# Altium PCB Flex_design.PcbDoc
Units mm, origin at the board's own origin, x right, y up, seen from the top; angles counter-clockwise.
Board outline 64.63 x 25.28 mm, 4 copper layers (Top Layer, Top GND, Bottom GND, Bottom Layer), stack 0.76 mm thick; 2 components, 68 nets, 138 pads, 171 vias.
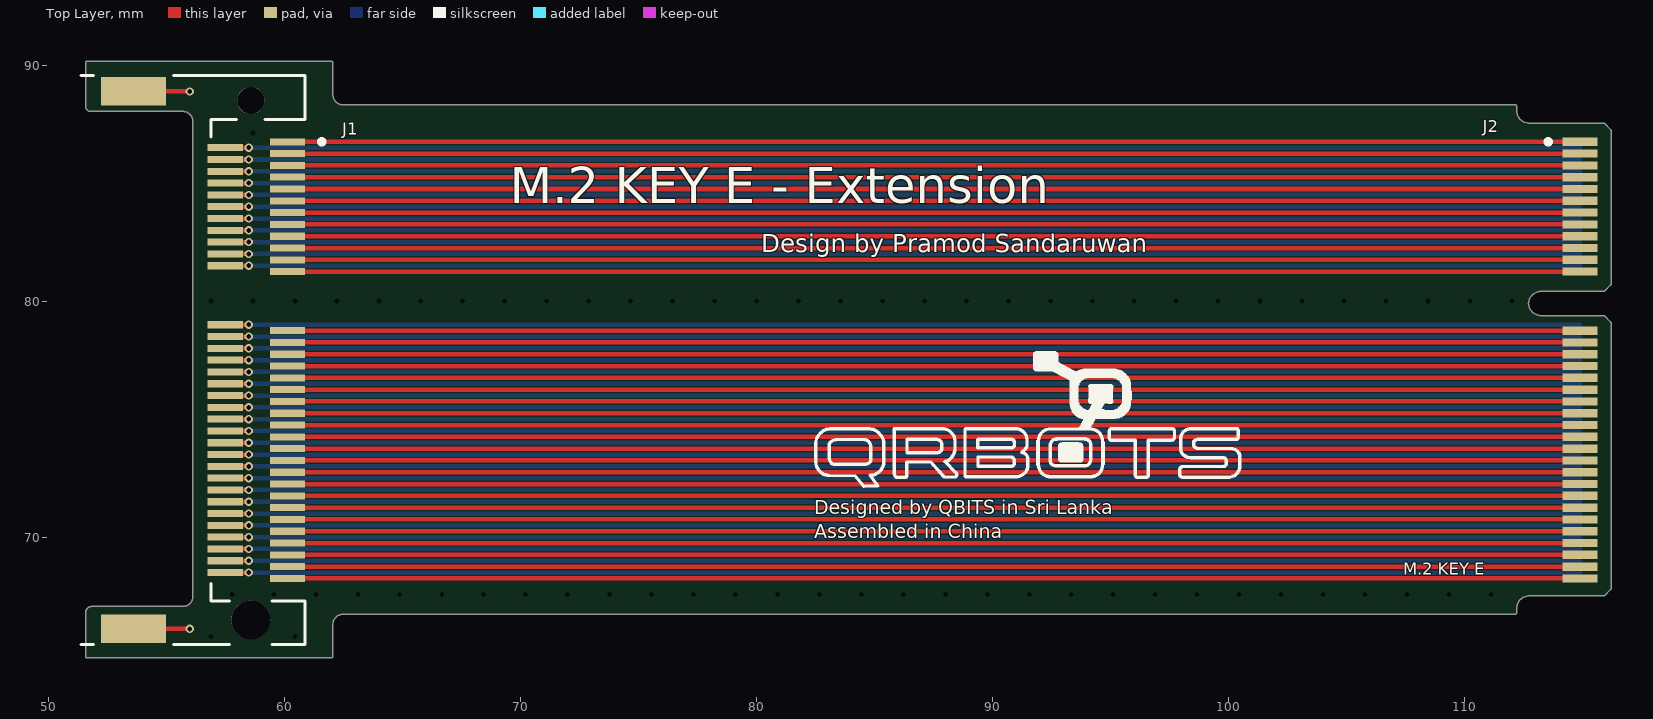
[diagram p0: Top Layer view]
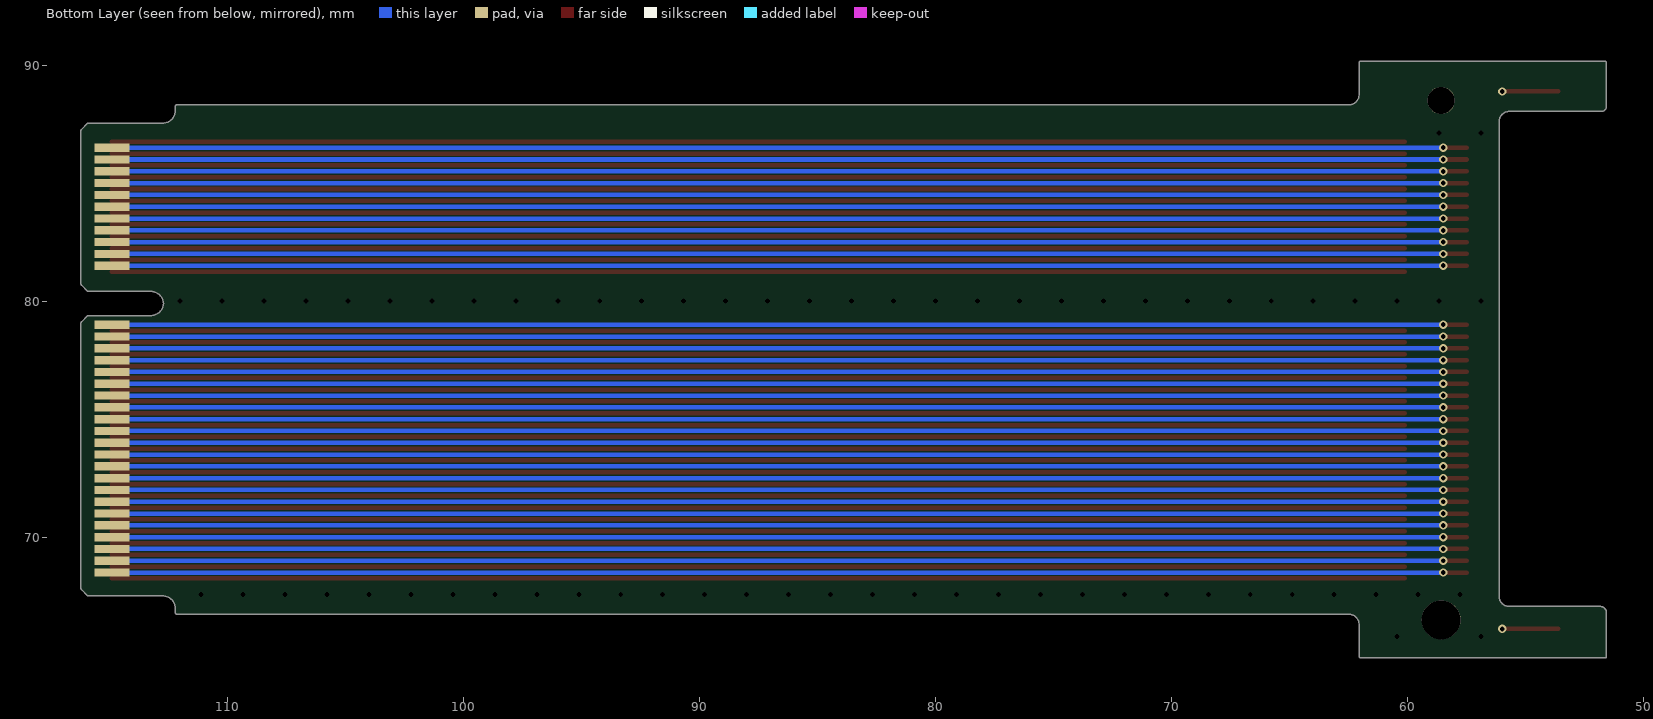
[diagram p1: Bottom Layer view, seen from below]
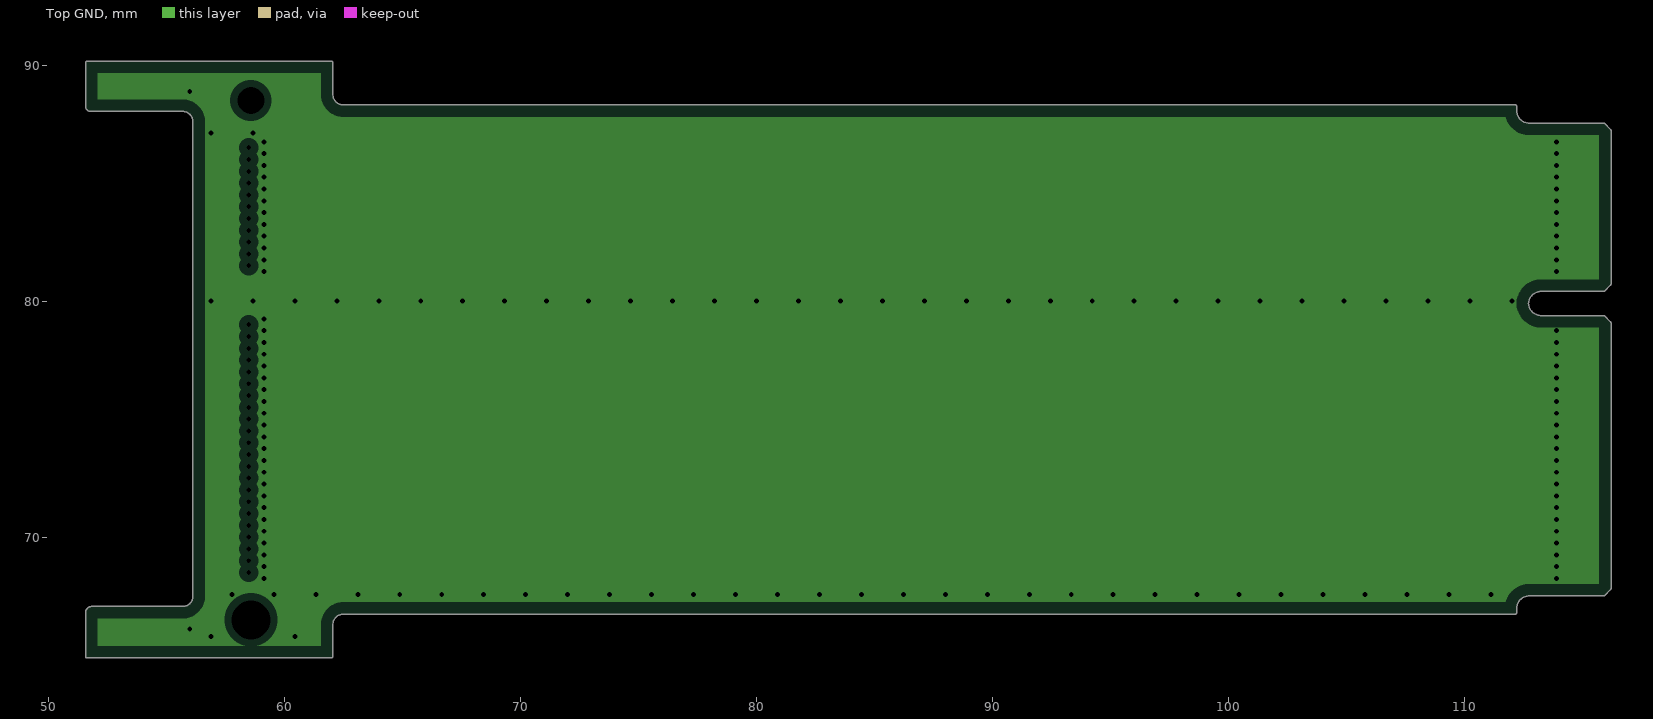
[diagram p2: Top GND, clearances drawn from the general rule]
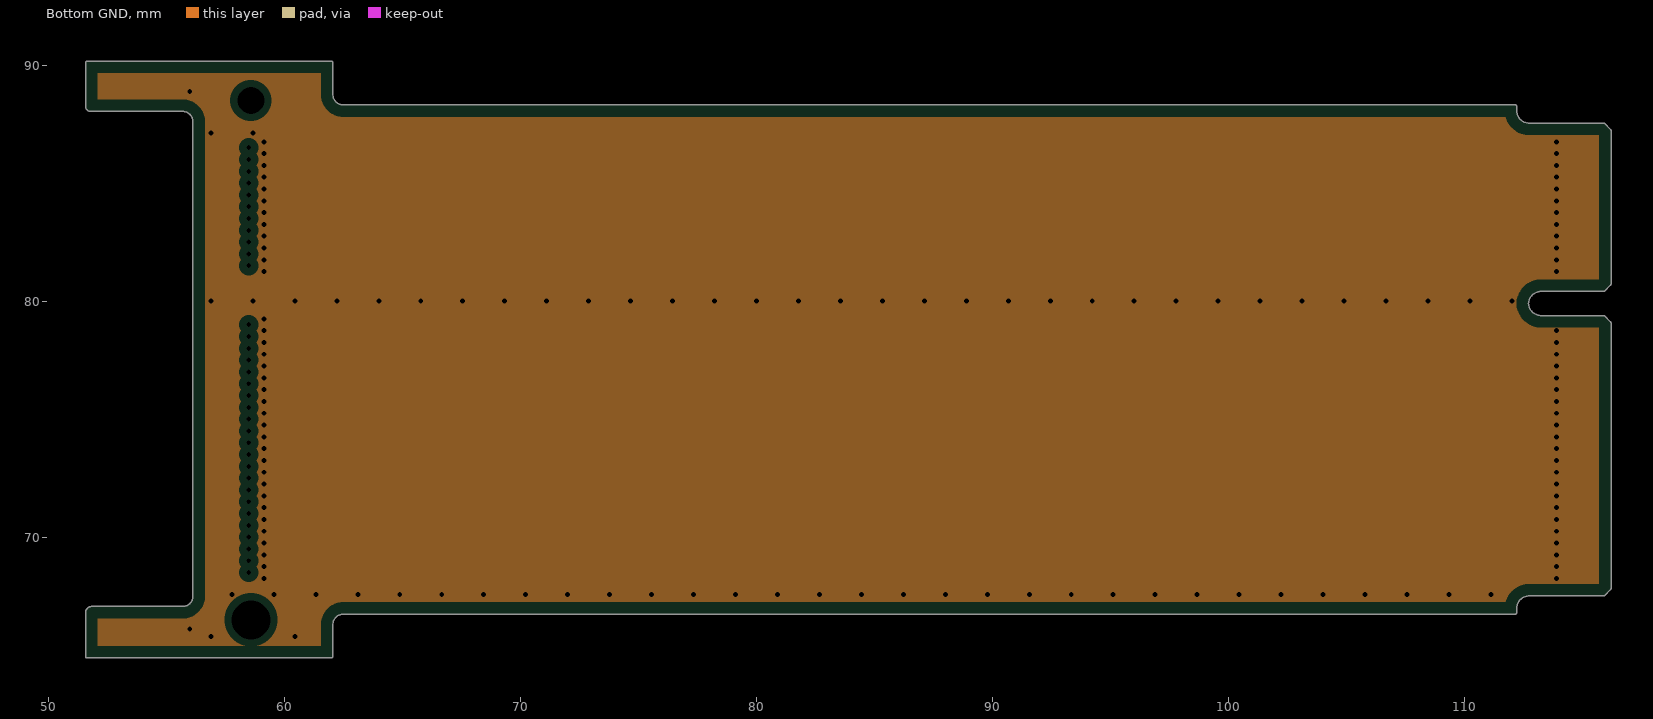
[diagram p3: Bottom GND, clearances drawn from the general rule]

## Layer stack, top to bottom
Top Solder: solder mask 0.0102, Solder Resist, Dk 3.5
Top Layer: signal copper 0.035
Dielectric 4: prepreg 0.11, PP-006, Dk 4.1
Top GND: plane copper 0.035, net GND
Dielectric 1: dielectric 0.4, FR-4, Dk 4.8
Bottom GND: plane copper 0.035, net GND
Dielectric 5: prepreg 0.11, PP-006, Dk 4.1
Bottom Layer: signal copper 0.035
Bottom Solder: solder mask 0.0102, Solder Resist, Dk 3.5

## Board outline
51.586,64.95 51.586,66.8 cw(c51.85,66.8) 51.85,67.064 55.7,67.064 ccw(c55.7,67.5) 56.136,67.5 56.136,87.6 ccw(c55.7,87.6) 55.7,88.036 51.8,88.036 cw(c51.8,88.25) 51.586,88.25 51.586,90.1 cw(c51.65,90.1) 51.65,90.164 62,90.164 cw(c62,90.1) 62.064,90.1 62.064,88.75 ccw(c62.5,88.75) 62.5,88.314 cw(c62.5,88.25) 62.501,88.314 104.2,88.314 112.15,88.314 cw(c112.15,88.25) 112.214,88.25 112.214,88.075 ccw(c112.75,88.075) 112.75,87.539 115.9,87.539 cw(c115.9,87.475) 115.945,87.52 116.195,87.27 cw(c116.15,87.225) 116.214,87.225 116.214,80.725 cw(c116.15,80.725) 116.195,80.68 115.945,80.43 cw(c115.9,80.475) 115.9,80.411 113.25,80.411 ccw(c113.25,80.475) 113.251,80.411 113.25,80.411 ccw(c113.25,79.875) 112.714,79.9 ccw(c113.25,79.925) 113.25,79.389 115.9,79.389 cw(c115.9,79.325) 115.945,79.37 116.195,79.12 cw(c116.15,79.075) 116.214,79.075 116.214,67.825 cw(c116.15,67.825) 116.195,67.78 115.945,67.53 cw(c115.9,67.575) 115.9,67.511 112.75,67.511 ccw(c112.75,66.975) 112.214,66.975 112.214,66.8 cw(c112.15,66.8) 112.15,66.736 111.4,66.736 62.501,66.736 62.5,66.736 ccw(c62.5,66.777) 62.501,66.736 62.5,66.736 ccw(c62.5,66.3) 62.064,66.3 62.064,64.95 cw(c62,64.95) 62,64.886 51.65,64.886 cw(c51.65,64.95)
board region "Layer Stack Region 1": 107,66.736 66,66.736 66,88.314 104.2,88.314 107,88.314
board region "Layer Stack Region 1": 66,66.736 62.5,66.736 62.415,66.728 62.258,66.663 62.137,66.542 62.072,66.385 62.064,66.3 62.064,64.95 62.064,64.937 62.054,64.914 62.036,64.896 62.013,64.886 62,64.886 51.65,64.886 51.637,64.886 51.614,64.896 51.596,64.914 51.586,64.937 51.586,64.95 51.586,66.8 51.586,66.852 51.626,66.949 51.701,67.024 51.798,67.064 51.85,67.064 55.7,67.064 55.785,67.072 55.942,67.137 56.063,67.258 56.128,67.415 56.136,67.5 56.136,87.6 56.128,87.685 56.063,87.842 55.942,87.963 55.785,88.028 55.7,88.036 51.8,88.036 51.757,88.036 51.679,88.069 51.619,88.129 51.586,88.207 51.586,88.25 51.586,90.1 51.586,90.113 51.596,90.136 51.614,90.154 51.637,90.164 51.65,90.164 62,90.164 62.013,90.164 62.036,90.154 62.054,90.136 62.064,90.113 62.064,90.1 62.064,88.75 62.072,88.665 62.137,88.508 62.258,88.387 62.415,88.322 62.501,88.314 66,88.314
board region "Layer Stack Region 1": 107,88.314 112.15,88.314 112.163,88.314 112.186,88.304 112.204,88.286 112.214,88.263 112.214,88.25 112.214,88.075 112.224,87.97 112.304,87.777 112.452,87.629 112.645,87.549 112.75,87.539 115.906,87.539 115.93,87.532 115.945,87.52 116.2,87.266 116.211,87.244 116.214,87.225 116.214,80.719 116.207,80.695 116.195,80.68 115.941,80.425 115.919,80.414 115.9,80.411 113.25,80.411 113.148,80.401 112.96,80.326 112.813,80.186 112.729,80.001 112.714,79.9 112.729,79.799 112.813,79.614 112.96,79.474 113.148,79.399 113.25,79.389 115.906,79.389 115.93,79.382 115.945,79.37 116.2,79.116 116.211,79.094 116.214,79.075 116.214,67.819 116.207,67.795 116.195,67.78 115.941,67.525 115.919,67.514 115.9,67.511 112.75,67.511 112.645,67.501 112.452,67.421 112.304,67.273 112.224,67.08 112.214,66.975 112.214,66.8 112.214,66.787 112.204,66.764 112.186,66.746 112.163,66.736 112.15,66.736 111.4,66.736 107,66.736

## Design rules (kind name [scope] priority, off if disabled: settings)
BackDrilling [InNet('GND')] p1: maxstublength=0.145 usetopbackdrill=TRUE usebottombackdrill=TRUE holeoversize=0.026 holetolplus=0 holetolminus=0
Clearance [All] p1: gap=0.127 ignorepadtopadclearanceinfootprint=TRUE except(0: Arc-Hole Track-Hole SMDPad-Hole THPad-Hole Via-Hole Fill-Hole Poly-Hole Region-Hole Text-Hole)
MinimumSolderMaskSliver [All] p1: minsoldermaskwidth=0.05
PlaneClearance [All] p1: clearance=0.3
PlaneConnect [All] p1: planeconnectstyle=Direct reliefexpansion=0.508 reliefentries=4 reliefconductorwidth=0.254 reliefairgap=0.254
PolygonConnect [All] p1: connectstyle=Relief reliefconductorwidth=0.254 reliefentries=4 polygonreliefangle="90 Angle" airgapwidth=0.254
RoutingVias [All] p1: holewidth=0.711 width=1.27 viastyle="Through Hole" minholewidth=0.711 minwidth=1.27 maxholewidth=0.711 maxwidth=1.27
SilkToSilkClearance [All] p1: silktosilkclearance=0.1
SilkToSolderMaskClearance [IsPad] p1: minsilkscreentomaskgap=0.1 clearancetoexposedcopper=TRUE
SolderMaskExpansion SolderMaskExpansion_via [IsVia] p1: expansion=0.102 istentingtop=TRUE
SolderMaskExpansion [All] p2: expansion=0.04 istentingtop=FALSE
Width [All] p1: maxlimit=0.191 minlimit=0.191 preferedwidth=0.191 substack1={DC98C919-03CF-4225-8EA8-CE3CF64AE8FB} impedanceprofiledriven=TRUE impedanceprofileid={71EC6365-5B8F-47C4-84C8-B24A6046902B} impedanceprofilevalue=50.000000 minimp=50.000000 maximp=50.000000 favimp=50.000000
25 further rules are at their usual default settings.

## Components (designator, comment, footprint, x,y, rotation, side; value= is the part's Value field where it differs from the comment)
J1 "MDT180E01001" AMPHENOL_MDT180E01001 58.59,77.5 r270 top locked
J2 "M.2_KEY_E" M.2_KEY_E 116.15,80.725 r90 top

## Footprints (in the part's own frame and the unit in brackets; to place one, negate y for a bottom-side part, rotate by r counter-clockwise, add the part's x,y. Pads: shape width x height; smd on the part's side, far side on the other; paste and mask are expansions set on the pad)
AMPHENOL_MDT180E01001 [mm]
  rect 0.3x1.5 smd: 1(-9.25,1.55) 2(-9,-1.09) 3(-8.75,1.55) 4(-8.5,-1.09) 5(-8.25,1.55) 6(-8,-1.09) 7(-7.75,1.55) 8(-7.5,-1.09) 9(-7.25,1.55) 10(-7,-1.09) 11(-6.75,1.55) 12(-6.5,-1.09) 13(-6.25,1.55) 14(-6,-1.09) 15(-5.75,1.55) 16(-5.5,-1.09) 17(-5.25,1.55) 18(-5,-1.09) 19(-4.75,1.55) 20(-4.5,-1.09) 21(-4.25,1.55) 22(-4,-1.09) 23(-3.75,1.55) 32(-1.5,-1.09) 33(-1.25,1.55) 34(-1,-1.09) 35(-0.75,1.55) 36(-0.5,-1.09) 37(-0.25,1.55) 38(0,-1.09) 39(0.25,1.55) 40(0.5,-1.09) 41(0.75,1.55) 42(1,-1.09) 43(1.25,1.55) 44(1.5,-1.09) 45(1.75,1.55) 46(2,-1.09) 47(2.25,1.55) 48(2.5,-1.09) 49(2.75,1.55) 50(3,-1.09) 51(3.25,1.55) 52(3.5,-1.09) 53(3.75,1.55) 54(4,-1.09) 55(4.25,1.55) 56(4.5,-1.09) 57(4.75,1.55) 58(5,-1.09) 59(5.25,1.55) 60(5.5,-1.09) 61(5.75,1.55) 62(6,-1.09) 63(6.25,1.55) 64(6.5,-1.09) 65(6.75,1.55) 66(7,-1.09) 67(7.25,1.55) 68(7.5,-1.09) 69(7.75,1.55) 70(8,-1.09) 71(8.25,1.55) 72(8.5,-1.09) 73(8.75,1.55) 74(9,-1.09) 75(9.25,1.55)
  rect 1.2x2.75 smd: S1(-11.385,-4.97) S2(11.385,-4.97)
  round 1.15 hole 1.15 unplated: ""(-11,0)
  round 1.65 hole 1.65 unplated: ""(11,0)
  silkscreen extent -12.05,-7.2 12.05,3.1, body extent -11.95,-7 11.95,2.2, height 1.75
M.2_KEY_E [mm]
  rect 0.35x1.5 smd: 1(6.025,1.25) 3(5.525,1.25) 5(5.025,1.25) 7(4.525,1.25) 9(4.025,1.25) 11(3.525,1.25) 13(3.025,1.25) 15(2.525,1.25) 17(2.025,1.25) 19(1.525,1.25) 21(1.025,1.25) 23(0.525,1.25) 33(-1.975,1.25) 35(-2.475,1.25) 37(-2.975,1.25) 39(-3.475,1.25) 41(-3.975,1.25) 43(-4.475,1.25) 45(-4.975,1.25) 47(-5.475,1.25) 49(-5.975,1.25) 51(-6.475,1.25) 53(-6.975,1.25) 55(-7.475,1.25) 57(-7.975,1.25) 59(-8.475,1.25) 61(-8.975,1.25) 63(-9.475,1.25) 65(-9.975,1.25) 67(-10.475,1.25) 69(-10.975,1.25) 71(-11.475,1.25) 73(-11.975,1.25) 75(-12.475,1.25)
  rect 0.35x1.5 smd far side: 2(5.775,1.25) 4(5.275,1.25) 6(4.775,1.25) 8(4.275,1.25) 10(3.775,1.25) 12(3.275,1.25) 14(2.775,1.25) 16(2.275,1.25) 18(1.775,1.25) 20(1.275,1.25) 22(0.775,1.25) 32(-1.725,1.25) 34(-2.225,1.25) 36(-2.725,1.25) 38(-3.225,1.25) 40(-3.725,1.25) 42(-4.225,1.25) 44(-4.725,1.25) 46(-5.225,1.25) 48(-5.725,1.25) 50(-6.225,1.25) 52(-6.725,1.25) 54(-7.225,1.25) 56(-7.725,1.25) 58(-8.225,1.25) 60(-8.725,1.25) 62(-9.225,1.25) 64(-9.725,1.25) 66(-10.225,1.25) 68(-10.725,1.25) 70(-11.225,1.25) 72(-11.725,1.25) 74(-12.225,1.25)
  silkscreen extent 5.93,2.5 6.12,2.7

## Part data
J1: "PCIe M.2 Connectors, Storage and Server Connector, P=0.5mm, H=1.8mm, Key E, 30Î¼in Au Plating", Package=None, Availability="In Stock", Check_prices=https://www.snapeda.com/parts/MDT180E01001/Amphenol/view-part/?ref=eda, MF=Amphenol, MP=MDT180E01001, Price=None, Purchase-URL=https://pricing.snapeda.com/search/part/MDT180E01001/?ref=eda, SnapEDA_Link=https://www.snapeda.com/parts/MDT180E01001/Amphenol/view-part/?ref=snap

## Via types
v1: diameter 0, hole 0.21, Top GND to Bottom GND, tented both sides, 69 vias
v2: diameter 0, hole 0.21, Top Layer to Bottom Layer, 67 vias
v3: diameter 0.35, hole 0.21, Top Layer to Bottom Layer, tented both sides, 35 vias

## Nets (pads, with @x,y where several pads share a name; then routed paths per layer and width w, separated by ;. In a path a pad name is that pad's centre, name@x,y a point inside that pad or via, vN(x,y) a via of type N, cw(c..) or ccw(c..) an arc to the next point about the centre after c; other vN are vias at no path point)
GND: J1.S1 J1.S2 | length 4.8
  Top Layer w0.191: J1.S2 v3(56,66.115) ; J1.S1 v3(56,88.885)
  other v1: 59.14,68.25 113.9,68.25 59.14,68.75 113.9,68.75 59.14,69.25 113.9,69.25 59.14,69.75 113.9,69.75 59.14,70.25 113.9,70.25 59.14,70.75 113.9,70.75 59.14,71.25 113.9,71.25 59.14,71.75 113.9,71.75 59.14,72.25 113.9,72.25 59.14,72.75 113.9,72.75 59.14,73.25 113.9,73.25 59.14,73.75 113.9,73.75 59.14,74.25 113.9,74.25 59.14,74.75 113.9,74.75 59.14,75.25 113.9,75.25 59.14,75.75 113.9,75.75 59.14,76.25 113.9,76.25 59.14,76.75 113.9,76.75 59.14,77.25 113.9,77.25 59.14,77.75 113.9,77.75 59.14,78.25 113.9,78.25 59.14,78.75 113.9,78.75 59.14,79.25 59.14,81.25 113.9,81.25 59.14,81.75 113.9,81.75 59.14,82.25 113.9,82.25 59.14,82.75 113.9,82.75 59.14,83.25 113.9,83.25 59.14,83.75 113.9,83.75 59.14,84.25 113.9,84.25 59.14,84.75 113.9,84.75 59.14,85.25 113.9,85.25 59.14,85.75 113.9,85.75 59.14,86.25 113.9,86.25 59.14,86.75 113.9,86.75
  other v2: 56.896,65.786 60.452,65.786 57.785,67.564 59.563,67.564 61.341,67.564 63.119,67.564 64.897,67.564 66.675,67.564 68.453,67.564 70.231,67.564 72.009,67.564 73.787,67.564 75.565,67.564 77.343,67.564 79.121,67.564 80.899,67.564 82.677,67.564 84.455,67.564 86.233,67.564 88.011,67.564 89.789,67.564 91.567,67.564 93.345,67.564 95.123,67.564 96.901,67.564 98.679,67.564 100.457,67.564 102.235,67.564 104.013,67.564 105.791,67.564 107.569,67.564 109.347,67.564 111.125,67.564 56.896,80.01 58.674,80.01 60.452,80.01 62.23,80.01 64.008,80.01 65.786,80.01 67.564,80.01 69.342,80.01 71.12,80.01 72.898,80.01 74.676,80.01 76.454,80.01 78.232,80.01 80.01,80.01 81.788,80.01 83.566,80.01 85.344,80.01 87.122,80.01 88.9,80.01 90.678,80.01 92.456,80.01 94.234,80.01 96.012,80.01 97.79,80.01 99.568,80.01 101.346,80.01 103.124,80.01 104.902,80.01 106.68,80.01 108.458,80.01 110.236,80.01 112.014,80.01 56.896,87.122 58.674,87.122
P_1: J1.1 J2.1 | length 54.8
  Top Layer w0.191: J1.1 J2.1
P_2: J1.2 J2.2 | length 57.4
  Top Layer w0.191: J1.2 v3(58.5,86.5)
  Bottom Layer w0.191: v3(58.5,86.5) J2.2
P_3: J1.3 J2.3 | length 54.8
  Top Layer w0.191: J1.3 J2.3
P_4: J1.4 J2.4 | length 57.4
  Top Layer w0.191: J1.4 v3(58.5,86)
  Bottom Layer w0.191: v3(58.5,86) J2.4
P_5: J1.5 J2.5 | length 54.8
  Top Layer w0.191: J1.5 J2.5
P_6: J1.6 J2.6 | length 57.4
  Top Layer w0.191: J1.6 v3(58.5,85.5)
  Bottom Layer w0.191: v3(58.5,85.5) J2.6
P_7: J1.7 J2.7 | length 54.8
  Top Layer w0.191: J1.7 J2.7
P_8: J1.8 J2.8 | length 57.4
  Top Layer w0.191: J1.8 v3(58.5,85)
  Bottom Layer w0.191: v3(58.5,85) J2.8
P_9: J1.9 J2.9 | length 54.8
  Top Layer w0.191: J1.9 J2.9
P_10: J1.10 J2.10 | length 57.4
  Top Layer w0.191: J1.10 v3(58.5,84.5)
  Bottom Layer w0.191: v3(58.5,84.5) J2.10
P_11: J1.11 J2.11 | length 54.8
  Top Layer w0.191: J1.11 J2.11
P_12: J1.12 J2.12 | length 57.4
  Top Layer w0.191: J1.12 v3(58.5,84)
  Bottom Layer w0.191: v3(58.5,84) J2.12
P_13: J1.13 J2.13 | length 54.8
  Top Layer w0.191: J1.13 J2.13
P_14: J1.14 J2.14 | length 57.4
  Top Layer w0.191: J1.14 v3(58.5,83.5)
  Bottom Layer w0.191: v3(58.5,83.5) J2.14
P_15: J1.15 J2.15 | length 54.8
  Top Layer w0.191: J1.15 J2.15
P_16: J1.16 J2.16 | length 57.4
  Top Layer w0.191: J1.16 v3(58.5,83)
  Bottom Layer w0.191: v3(58.5,83) J2.16
P_17: J1.17 J2.17 | length 54.8
  Top Layer w0.191: J1.17 J2.17
P_18: J1.18 J2.18 | length 57.4
  Top Layer w0.191: J1.18 v3(58.5,82.5)
  Bottom Layer w0.191: v3(58.5,82.5) J2.18
P_19: J1.19 J2.19 | length 54.8
  Top Layer w0.191: J1.19 J2.19
P_20: J1.20 J2.20 | length 57.4
  Top Layer w0.191: J1.20 v3(58.5,82)
  Bottom Layer w0.191: v3(58.5,82) J2.20
P_21: J1.21 J2.21 | length 54.8
  Top Layer w0.191: J1.21 J2.21
P_22: J1.22 J2.22 | length 57.4
  Top Layer w0.191: J1.22 v3(58.5,81.5)
  Bottom Layer w0.191: v3(58.5,81.5) J2.22
P_23: J1.23 J2.23 | length 54.8
  Top Layer w0.191: J1.23 J2.23
P_32: J1.32 J2.32 | length 57.4
  Top Layer w0.191: J1.32 v3(58.5,79)
  Bottom Layer w0.191: v3(58.5,79) J2.32
P_33: J1.33 J2.33 | length 54.8
  Top Layer w0.191: J1.33 J2.33
P_34: J1.34 J2.34 | length 57.4
  Top Layer w0.191: J1.34 v3(58.5,78.5)
  Bottom Layer w0.191: v3(58.5,78.5) J2.34
P_35: J1.35 J2.35 | length 54.8
  Top Layer w0.191: J1.35 J2.35
P_36: J1.36 J2.36 | length 57.4
  Top Layer w0.191: J1.36 v3(58.5,78)
  Bottom Layer w0.191: v3(58.5,78) J2.36
P_37: J1.37 J2.37 | length 54.8
  Top Layer w0.191: J1.37 J2.37
P_38: J1.38 J2.38 | length 57.4
  Top Layer w0.191: J1.38 v3(58.5,77.5)
  Bottom Layer w0.191: v3(58.5,77.5) J2.38
P_39: J1.39 J2.39 | length 54.8
  Top Layer w0.191: J1.39 J2.39
P_40: J1.40 J2.40 | length 57.4
  Top Layer w0.191: J1.40 v3(58.5,77)
  Bottom Layer w0.191: v3(58.5,77) J2.40
P_41: J1.41 J2.41 | length 54.8
  Top Layer w0.191: J1.41 J2.41
P_42: J1.42 J2.42 | length 57.4
  Top Layer w0.191: J1.42 v3(58.5,76.5)
  Bottom Layer w0.191: v3(58.5,76.5) J2.42
P_43: J1.43 J2.43 | length 54.8
  Top Layer w0.191: J1.43 J2.43
P_44: J1.44 J2.44 | length 57.4
  Top Layer w0.191: J1.44 v3(58.5,76)
  Bottom Layer w0.191: v3(58.5,76) J2.44
P_45: J1.45 J2.45 | length 54.8
  Top Layer w0.191: J1.45 J2.45
P_46: J1.46 J2.46 | length 57.4
  Top Layer w0.191: J1.46 v3(58.5,75.5)
  Bottom Layer w0.191: v3(58.5,75.5) J2.46
P_47: J1.47 J2.47 | length 54.8
  Top Layer w0.191: J1.47 J2.47
P_48: J1.48 J2.48 | length 57.4
  Top Layer w0.191: J1.48 v3(58.5,75)
  Bottom Layer w0.191: v3(58.5,75) J2.48
P_49: J1.49 J2.49 | length 54.8
  Top Layer w0.191: J1.49 J2.49
P_50: J1.50 J2.50 | length 57.4
  Top Layer w0.191: J1.50 v3(58.5,74.5)
  Bottom Layer w0.191: v3(58.5,74.5) J2.50
P_51: J1.51 J2.51 | length 54.8
  Top Layer w0.191: J1.51 J2.51
P_52: J1.52 J2.52 | length 57.4
  Top Layer w0.191: J1.52 v3(58.5,74)
  Bottom Layer w0.191: v3(58.5,74) J2.52
P_53: J1.53 J2.53 | length 54.8
  Top Layer w0.191: J1.53 J2.53
P_54: J1.54 J2.54 | length 57.4
  Top Layer w0.191: J1.54 v3(58.5,73.5)
  Bottom Layer w0.191: v3(58.5,73.5) J2.54
P_55: J1.55 J2.55 | length 54.8
  Top Layer w0.191: J1.55 J2.55
P_56: J1.56 J2.56 | length 57.4
  Top Layer w0.191: J1.56 58.346,73 v3(58.5,73)
  Bottom Layer w0.191: v3(58.5,73) 114.054,73 J2.56
P_57: J1.57 J2.57 | length 54.8
  Top Layer w0.191: J1.57 J2.57
P_58: J1.58 J2.58 | length 57.4
  Top Layer w0.191: J1.58 v3(58.5,72.5)
  Bottom Layer w0.191: v3(58.5,72.5) J2.58
P_59: J1.59 J2.59 | length 54.8
  Top Layer w0.191: J1.59 J2.59
P_60: J1.60 J2.60 | length 57.4
  Top Layer w0.191: J1.60 v3(58.5,72)
  Bottom Layer w0.191: v3(58.5,72) J2.60
P_61: J1.61 J2.61 | length 54.8
  Top Layer w0.191: J1.61 J2.61
P_62: J1.62 J2.62 | length 57.4
  Top Layer w0.191: J1.62 58.346,71.5 v3(58.5,71.5)
  Bottom Layer w0.191: v3(58.5,71.5) 114.054,71.5 J2.62
P_63: J1.63 J2.63 | length 54.8
  Top Layer w0.191: J1.63 J2.63
P_64: J1.64 J2.64 | length 57.4
  Top Layer w0.191: J1.64 v3(58.5,71)
  Bottom Layer w0.191: v3(58.5,71) J2.64
P_65: J1.65 J2.65 | length 54.8
  Top Layer w0.191: J1.65 J2.65
P_66: J1.66 J2.66 | length 57.4
  Top Layer w0.191: J1.66 58.346,70.5 v3(58.5,70.5)
  Bottom Layer w0.191: v3(58.5,70.5) 114.054,70.5 J2.66
P_67: J1.67 J2.67 | length 54.8
  Top Layer w0.191: J1.67 J2.67
P_68: J1.68 J2.68 | length 57.4
  Top Layer w0.191: J1.68 v3(58.5,70)
  Bottom Layer w0.191: v3(58.5,70) J2.68
P_69: J1.69 J2.69 | length 54.8
  Top Layer w0.191: J1.69 J2.69
P_70: J1.70 J2.70 | length 57.4
  Top Layer w0.191: J1.70 v3(58.5,69.5)
  Bottom Layer w0.191: v3(58.5,69.5) J2.70
P_71: J1.71 J2.71 | length 54.8
  Top Layer w0.191: J1.71 J2.71
P_72: J1.72 J2.72 | length 57.4
  Top Layer w0.191: J1.72 58.346,69 v3(58.5,69)
  Bottom Layer w0.191: v3(58.5,69) 114.054,69 J2.72
P_73: J1.73 J2.73 | length 54.8
  Top Layer w0.191: J1.73 J2.73
P_74: J1.74 J2.74 | length 57.4
  Top Layer w0.191: J1.74 v3(58.5,68.5)
  Bottom Layer w0.191: v3(58.5,68.5) J2.74
P_75: J1.75 J2.75 | length 54.8
  Top Layer w0.191: J1.75 J2.75
pads on no net: J1.

## Polygon pours and split planes (outlines as drawn)
no net on Layer0 "Default Coverlay 2 Bottom" (split plane): 66,88.25 107,88.25 107,66.8 66,66.8
no net on Layer0 "Default Coverlay 2 Top" (split plane): 66,88.25 107,88.25 107,66.8 66,66.8
GND on Top GND (split plane): 62.501,67.247
GND on Top GND (split plane): 62.5,67.247 62.499,67.246 62.5,67.247
GND on Top GND (split plane): 61.553,88.75 61.555,88.737 61.562,88.627 61.586,88.505 61.626,88.388 61.681,88.277 61.749,88.174 61.831,88.081 61.924,87.999 62.027,87.931 62.138,87.876 62.255,87.836 62.377,87.812 62.487,87.805 62.496,87.804 62.5,87.803 62.501,87.803 104.2,87.803 111.74,87.803 111.783,87.675 111.844,87.552 111.92,87.438 112.01,87.335 112.113,87.245 112.227,87.169 112.35,87.108 112.479,87.064 112.613,87.038 112.743,87.029 112.75,87.028 115.703,87.028 115.703,80.922 113.252,80.922 113.252,80.958 113.25,80.958 113.248,80.958 113.248,80.922 113.238,80.921 113.113,80.912 112.979,80.886 112.85,80.842 112.727,80.781 112.613,80.705 112.51,80.615 112.42,80.512 112.344,80.398 112.283,80.275 112.239,80.146 112.213,80.012 112.208,79.939 112.205,79.908 112.204,79.9 112.206,79.876 112.208,79.861 112.213,79.788 112.239,79.654 112.283,79.525 112.344,79.402 112.42,79.288 112.51,79.185 112.613,79.095 112.727,79.019 112.85,78.958 112.979,78.914 113.113,78.888 113.243,78.879 113.25,78.878 115.703,78.878 115.703,68.022 112.75,68.022 112.743,68.021 112.613,68.012 112.479,67.986 112.35,67.942 112.227,67.881 112.113,67.805 112.01,67.715 111.92,67.612 111.844,67.498 111.783,67.375 111.74,67.247 111.4,67.247 62.505,67.247 62.505,67.283 62.5,67.285 62.495,67.283 62.496,67.246 62.481,67.245 62.377,67.238 62.255,67.214 62.138,67.174 62.027,67.119 61.924,67.051 61.831,66.969 61.749,66.876 61.681,66.773 61.626,66.662 61.586,66.545 61.562,66.423 61.555,66.313 61.553,66.3 61.553,65.397 52.097,65.397 52.097,66.553 55.7,66.553 55.713,66.555 55.823,66.562 55.945,66.586 56.062,66.626 56.173,66.681 56.276,66.749 56.369,66.831 56.451,66.924 56.519,67.027 56.574,67.138 56.614,67.255 56.638,67.377 56.645,67.487 56.647,67.5 56.647,87.6 56.645,87.613 56.638,87.723 56.614,87.845 56.574,87.962 56.519,88.073 56.451,88.176 56.369,88.269 56.276,88.351 56.173,88.419 56.062,88.474 55.945,88.514 55.823,88.538 55.713,88.545 55.7,88.547 52.097,88.547 52.097,89.653 61.553,89.653
GND on Bottom GND (split plane): 62.501,67.247
GND on Bottom GND (split plane): 62.5,67.247 62.499,67.246 62.5,67.247
GND on Bottom GND (split plane): 61.553,88.75 61.555,88.737 61.562,88.627 61.586,88.505 61.626,88.388 61.681,88.277 61.749,88.174 61.831,88.081 61.924,87.999 62.027,87.931 62.138,87.876 62.255,87.836 62.377,87.812 62.487,87.805 62.496,87.804 62.5,87.803 62.501,87.803 104.2,87.803 111.74,87.803 111.783,87.675 111.844,87.552 111.92,87.438 112.01,87.335 112.113,87.245 112.227,87.169 112.35,87.108 112.479,87.064 112.613,87.038 112.743,87.029 112.75,87.028 115.703,87.028 115.703,80.922 113.252,80.922 113.252,80.958 113.25,80.958 113.248,80.958 113.248,80.922 113.238,80.921 113.113,80.912 112.979,80.886 112.85,80.842 112.727,80.781 112.613,80.705 112.51,80.615 112.42,80.512 112.344,80.398 112.283,80.275 112.239,80.146 112.213,80.012 112.208,79.939 112.205,79.908 112.204,79.9 112.206,79.876 112.208,79.861 112.213,79.788 112.239,79.654 112.283,79.525 112.344,79.402 112.42,79.288 112.51,79.185 112.613,79.095 112.727,79.019 112.85,78.958 112.979,78.914 113.113,78.888 113.243,78.879 113.25,78.878 115.703,78.878 115.703,68.022 112.75,68.022 112.743,68.021 112.613,68.012 112.479,67.986 112.35,67.942 112.227,67.881 112.113,67.805 112.01,67.715 111.92,67.612 111.844,67.498 111.783,67.375 111.74,67.247 111.4,67.247 62.505,67.247 62.505,67.283 62.5,67.285 62.495,67.283 62.496,67.246 62.481,67.245 62.377,67.238 62.255,67.214 62.138,67.174 62.027,67.119 61.924,67.051 61.831,66.969 61.749,66.876 61.681,66.773 61.626,66.662 61.586,66.545 61.562,66.423 61.555,66.313 61.553,66.3 61.553,65.397 52.097,65.397 52.097,66.553 55.7,66.553 55.713,66.555 55.823,66.562 55.945,66.586 56.062,66.626 56.173,66.681 56.276,66.749 56.369,66.831 56.451,66.924 56.519,67.027 56.574,67.138 56.614,67.255 56.638,67.377 56.645,67.487 56.647,67.5 56.647,87.6 56.645,87.613 56.638,87.723 56.614,87.845 56.574,87.962 56.519,88.073 56.451,88.176 56.369,88.269 56.276,88.351 56.173,88.419 56.062,88.474 55.945,88.514 55.823,88.538 55.713,88.545 55.7,88.547 52.097,88.547 52.097,89.653 61.553,89.653

## Other copper
Top Layer:
  pour cut-out: 56.536,80.6 56.536,87.2 cw(c56.9,87.2) 56.9,87.564 cw(c56.9,87.2) 57.258,87.264 58.242,87.264 cw(c58.6,87.2) 58.6,87.564 58.7,87.564 cw(c58.7,87.2) 59.058,87.264 116,87.264 cw(c116,87.2) 116.064,87.2 116.064,80.6 cw(c116,80.6) 116,80.536 56.6,80.536 cw(c56.6,80.6)
  pour cut-out: 56.5,67.9 56.5,79.5 112.4,79.5 112.4,79.2 116,79.2 116,67.9
Bottom Layer:
  pour cut-out: 58.1,80.9 116,80.9 116,87 58.1,87
  pour cut-out: 58.1,68 116,68 116,79.4 58.1,79.4

## Silkscreen, mask and mechanical layers (free items; w line width, h text height)
Top Overlay:
  drawing of 317 lines, arcs and shapes, not listed
  text "M.2 KEY E - Extension" at 69.554,84.154 h1.52
  text "Design by Pramod Sandaruwan" at 80.219,82.081 h0.76
  text "Designed by QBITS in Sri Lanka / Assembled in China" at 82.456,69.744 h1.02
  text "M.2 KEY E" at 107.402,68.402 h0.51
Route Tool Path:
  lines w0.127: 112.15,66.975 112.15,66.8 111.4,66.8 62.5,66.8 ccw(c62.5,66.3) 62,66.3 62,64.95 51.65,64.95 51.65,66.8 cw(c51.85,66.8) 51.85,67 55.7,67 ccw(c55.7,67.5) 56.2,67.5 56.2,87.6 ccw(c55.7,87.6) 55.7,88.1 51.8,88.1 cw(c51.8,88.25) 51.65,88.25 51.65,90.1 62,90.1 62,88.75 ccw(c62.5,88.75) 62.5,88.25 104.2,88.25 106,88.25 111.4,88.25 112.15,88.25 112.15,88.075 ccw(c112.75,88.075) 112.75,87.475 115.9,87.475 116.15,87.225 116.15,80.775 115.9,80.525 113.25,80.525 ccw(c113.25,79.925) 113.25,79.325 115.9,79.325 116.15,79.075 116.15,67.875 115.9,67.625 112.75,67.625 ccw(c112.75,67.025) 112.15,67.025